# EAGLE board pmod-level-conv-vqfn (EAGLE 7.7.0)
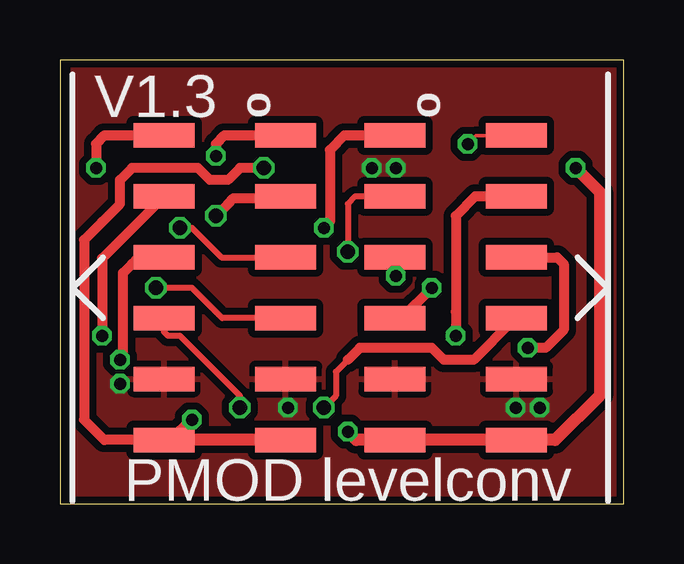
[diagram p0: board, top side]
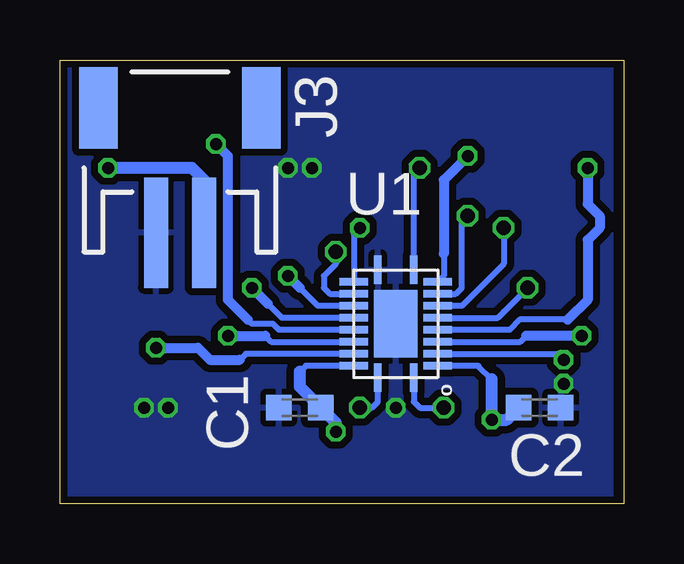
[diagram p1: board, bottom side, seen from below]

Size 23.5 x 18.5 mm. Coordinates in mm from the lower left corner, seen from the top.
Outline: 0,0 23.5,0 23.5,18.5 0,18.5 0,0
Copper layers (1*16): Top 0.035mm / dielectric 1.5mm / Bottom 0.035mm
Design rules "dirt_cheap_dirty_boards.v1.1": minimum track width 5mil, minimum drill 12mil, track to track 5mil, track to pad 5mil, pad to pad 5mil, via to via 5mil, smd to smd 0mil, copper to edge 10mil, drill to drill 10mil, minimum pad ring 10mil, minimum via ring 6mil, stop-mask expansion 2mil, vias tented up to drill 25mil, thermal gap 10mil

## Footprints (pad centres in the part's own frame; a part is rotated, then mirrored left to right if it is on the bottom)
C0603K = smd 1.05 x 1.08: 1 -0.875,0; 2 0.875,0
2X6_SMD_RA_SOCKET = smd 1.016 x 2.54: 1 6.35,2.54; 2 3.81,2.54; 3 1.27,2.54; 4 -1.27,2.54; 5 -3.81,2.54; 6 -6.35,2.54; 7 6.35,-2.54; 8 3.81,-2.54; 9 1.27,-2.54; 10 -1.27,-2.54; 11 -3.81,-2.54; 12 -6.35,-2.54
JST-2-SMD = smd 1 x 4.6: 1 -1,-3.7; 2 1,-3.7 | smd 1.6 x 3.4: NC1 -3.4,1.5; NC2 3.4,1.5
2X6_SMD_RA_PLUG = smd 1.016 x 2.54: 1 -6.35,2.54; 2 -3.81,2.54; 3 -1.27,2.54; 4 1.27,2.54; 5 3.81,2.54; 6 6.35,2.54; 7 -6.35,-2.54; 8 -3.81,-2.54; 9 -1.27,-2.54; 10 1.27,-2.54; 11 3.81,-2.54; 12 6.35,-2.54
VQFN-20 = smd 1.2 x 0.3: 1 2.25,0.75; 10 -2.25,0.75; 11 -2.25,-0.75; 20 2.25,-0.75 | smd 0.3 x 1.2: 2 1.75,1.75; 3 1.25,1.75; 4 0.75,1.75; 5 0.25,1.75; 6 -0.25,1.75; 7 -0.75,1.75; 8 -1.25,1.75; 9 -1.75,1.75; 12 -1.75,-1.75; 13 -1.25,-1.75; 14 -0.75,-1.75; 15 -0.25,-1.75; 16 0.25,-1.75; 17 0.75,-1.75; 18 1.25,-1.75; 19 1.75,-1.75 | smd 2.8 x 1.8: PAD 0,0

## Placement (x,y rotation side)
C1  0.1uF/10V  [C0603K]  13.5,4 180 bottom
C2  0.1uF/10V  [C0603K]  3.5,4 0 bottom
F  PMOD_SOCKET1  [2X6_SMD_RA_SOCKET]  16.5,9 90 top
J3  VCC  [JST-2-SMD]  18.5,15 0 bottom
M  PMOD_PLUG1  [2X6_SMD_RA_PLUG]  6.88,9 270 top
U1  TXB0108PWR  [VQFN-20]  9.5,7.5 270 bottom

## Library data of the parts
C1 C2 = rcl; SPICEPREFIX: C
F M = mechanical
J3 = SparkFun-Connectors; PROD_ID: CONN-11443
U1 = tom-semiconductors

## Nets
A1: M.10 U1.1
A2: M.9 U1.3
A3: M.8 U1.4
A4: M.7 U1.5
A5: M.4 U1.6
A6: M.3 U1.7
A7: M.2 U1.8
A8: M.1 U1.9
B1: F.10 U1.20
B2: F.9 U1.18
B3: F.8 U1.17
B4: F.7 U1.16
B5: F.4 U1.15
B6: F.3 U1.14
B7: F.2 U1.13
B8: F.1 U1.12
GND: C1.2 C2.2 F.5 F.11 J3.1 M.5 M.11 U1.11 U1.PAD
VCC: C1.1 F.6 F.12 J3.2 U1.19
VCCIO: C2.1 M.6 M.12 U1.2 U1.10

## Tracks (layer width: path | path; a pad name or v marks a point on that pad's centre or on a via)
A1  (via drill 0.6)
  Top 0.254: v7.5,4 7.5,4.5 5,7 4.5,7 4.33,7.17 M.10
  Bottom 0.254: U1.1 8.75,4.25 8.5,4 v7.5,4
A2  (via drill 0.5)
  Top 0.406: v2.5,6 2.62,6.12 2.62,8.56 2.62,9.62 3,10 3.27,10.27 M.9
  Bottom 0.254: U1.3 2.75,6.25 v2.5,6
A3  (via drill 0.5)
  Top 0.406: M.8 1.75,10.22 v1.75,7
  Bottom 0.254: U1.4 4.31,6.75 4.06,7
  Bottom 0.406: v1.75,7 4.06,7
A4  (via drill 0.5)
  Top 0.406: M.7 1.85,15.35 1.5,15 v1.5,14
  Bottom 0.254: 2.33,7.67 4.33,7.67 4.75,7.25 U1.5
  Bottom 0.406: v1.5,14 1.5,12.5 1,12 1,11.5 1.5,11 1.5,8.5 2.33,7.67
A5  (via drill 0.6)
  Top 0.254: M.4 6.77,7.73 5.5,9 v4,9
  Top 0.406: 9.98,7.73 M.4
  Bottom 0.254: U1.6 5.25,7.75 5,8 v4,9
A6  (via drill 0.6)
  Top 0.15: M.3 9.5,10.19
  Top 0.254: v5,11.5 5.5,11.5 6.73,10.27 M.3
  Bottom 0.254: v5,11.5 5,10 6.75,8.25 U1.7
A7  (via drill 0.6)
  Top 0.15: M.2 9.5,12.72
  Top 0.406: 9.5,12.72 7.22,12.72 7,12.5 v6.5,12
  Bottom 0.254: U1.8 7,8.75 6.75,9 6.75,11.75 v6.5,12
A8  (via drill 0.5)
  Top 0.406: M.1 6.85,15.35 6.5,15 v6.5,14.5
  Bottom 0.254: 7.5,10.41 7.5,9.5 U1.9
  Bottom 0.406: v6.5,14.5 7.5,13.5 7.5,10.41
B1  (via drill 0.6)
  Top 0.15: F.10 18.91,7.6 18.85,7.6
  Top 0.254: 12,6 11.5,5.5 11.5,4.5 v11,4
  Top 0.406: 12,6 12.5,6.5 15.5,6.5 16,6 17.25,6 18.85,7.6
  Bottom 0.254: v11,4 10.5,4 10.25,4.25 U1.20
B2  (via drill 0.5)
  Top 0.406: F.9 20.73,10.27 21,10 21,7.25 20.25,6.5 v19.5,6.5
  Bottom 0.254: U1.18 15.75,6.25 16,6
  Bottom 0.406: v19.5,6.5 17.75,6.5 17.25,6 16,6
B3  (via drill 0.5)
  Top 0.406: F.8 17.31,12.81 16.5,12 16.5,8 v16.5,7
  Bottom 0.254: 14.94,7 14.69,6.75 U1.17
  Bottom 0.406: v16.5,7 14.94,7
B4  (via drill 0.5)
  Top 0.15: v17,15 17.35,15.35 F.7
  Bottom 0.254: U1.16 14.38,7.25 14.62,7.5 15.5,7.5 15.68,7.67
  Bottom 0.406: 15.68,7.67 16.5,8.5 16.5,14.5 v17,15
B5  (via drill 0.5)
  Top 0.15: 14.23,7.73 F.4
  Top 0.406: v15.5,9 14.23,7.73
  Bottom 0.254: U1.15 14.25,7.75 14.82,8.32
  Bottom 0.406: 14.82,8.32 v15.5,9
B6  (via drill 0.5)
  Top 0.406: v14,9.5 14,10.23 F.3
  Bottom 0.254: U1.14 12.75,8.25 13.5,9
  Bottom 0.406: v14,9.5 13.5,9
B7  (via drill 0.6)
  Top 0.254: F.2 12.31,12.81 12,12.5 v12,10.5
  Bottom 0.254: v12,10.5 12,10 12.5,9.5 12.5,9 12.25,8.75 U1.13
B8  (via drill 0.5)
  Top 0.406: F.1 11.85,15.35 11.25,14.75 11.25,11.75 v11,11.5
  Bottom 0.254: v11,11.5 11.25,11.25 U1.12
GND  (via drill 0.5)
  other vias: 2.5,5 9.5,4 20,4 19,4 14,14 13,14
  pour Bottom (isolate 0.305): 0.5,18.5 23.5,18.5 23.5,0 0.5,0
  pour Top (isolate 0.305): 0.5,18.5 23.5,18.5 23.5,0 0.5,0
VCC  (via drill 0.5)
  Top 0.508: v12,3 12.35,2.65 F.6 F.12 20.65,2.65 22.5,4.5 22.5,13 v21.5,14
  Bottom 0.254: U1.19 13.25,5.75 13.5,5.5
  Bottom 0.406: J3.2 17.5,13.5
  Bottom 0.508: v12,3 12,3.38 C1.1 13.5,4.88 13.5,5.5 | 17.5,13.5 18,14 v21.5,14
VCCIO  (via drill 0.5, 0.6)
  Top 0.406: M.12 1.85,2.65 1,3.5 1,11 1.75,11.75 2.5,12.5 2.5,13.5 3,14 5.75,14 6.25,13.5 7,13.5 7.5,14 v8.5,14
  Top 0.508: M.6 M.12 4.65,2.65 v5.5,3.5
  Bottom 0.254: 5.5,5.18 6.05,5.72 6.07,5.75 U1.2 | U1.10 8.75,13.75 v8.5,14
  Bottom 0.508: C2.1 4.88,3.5 v5.5,3.5 5.5,5.18

## Text on the board
tPlace: V1.3 | PMOD levelconv